# EAGLE board Assignment 1 (EAGLE 9.7.0)

Size 138.51 x 127.98 mm. Coordinates in mm from the lower left corner, seen from the top.
Outline: 0,0 138.51,0 138.51,127.98 0,127.98 0,0
Copper layers (1*16): Top 0.035mm / dielectric 1.5mm / Bottom 0.035mm
Design rules "default": minimum track width 6mil, minimum drill 0.35mm, track to track 6mil, track to pad 6mil, pad to pad 6mil, via to via 6mil, smd to smd 6mil, copper to edge 40mil, drill to drill 6mil, minimum pad ring 10mil, minimum via ring 8mil, stop-mask expansion 4mil, vias tented up to drill 0mil, thermal gap 10mil

## Footprints (pad centres in the part's own frame; a part is rotated, then mirrored left to right if it is on the bottom)
1X02 = drill 1.016 long: 1 -1.27,0; 2 1.27,0
PIEZO = drill 1 pad 1.6: 1 -3.5,0; 2 3.5,0
28027 = drill 1.016 long: 1 -2.54,0; 2 0,0; 3 2.54,0
RESAD1016W63L850D250B = drill 0.83 pad 1.43: 1 -5.08,0; 2 5.08,0
ARDUINO-UNO-R3-SHIELD = drill 1.016 pad 1.88: 3.3V 24.13,-2.54; 5V 24.13,0; A0 24.13,12.7; A1 24.13,15.24; A2 24.13,17.78; A3 24.13,20.32; A4 24.13,22.86; A5 24.13,25.4; AREF -24.13,-13.97; D2 -24.13,20.32; D3 -24.13,17.78; D4 -24.13,15.24; D5 -24.13,12.7; D6 -24.13,10.16; D7 -24.13,7.62; D8 -24.13,3.81; D9 -24.13,1.27; D10 -24.13,-1.27; D11 -24.13,-3.81; D12 -24.13,-6.35; D13 -24.13,-8.89; GND@0 24.13,2.54; GND@1 24.13,5.08; GND@2 -24.13,-11.43; IOREF 24.13,-7.62; NC 24.13,-10.16; RES 24.13,-5.08; RX -24.13,25.4; SCL -24.13,-19.05; SDA -24.13,-16.51; TX -24.13,22.86; VIN 24.13,7.62

## Placement (x,y rotation side)
L1  LIGHTBULB  [1X02]  34.33,104.92 0 top
PIEZO1  PIEZO  [PIEZO]  70.91,114.4 0 top
PIR1  PIR-SENSOR_28027  [28027]  117.56,50.36 0 top
R2  1k  [RESAD1016W63L850D250B]  41.79,99.33 90 top
U1  ARDUINO-UNO-R3-SHIELD  [ARDUINO-UNO-R3-SHIELD]  47.88,29.84 270 top

## Library data of the parts
L1 PIEZO1 PIR1 R2 U1 = Tinkercad

## Nets
L1_2: L1.2 R2.2
U1_5V: PIR1.2 U1.5V
U1_D3: PIEZO1.1 U1.D3
U1_D6: PIR1.1 U1.D6
U1_D10: R2.1 U1.D10
U1_GND: L1.1 PIEZO1.2 PIR1.3 U1.GND@0 U1.GND@1 U1.GND@2

## Tracks (layer width: path | path; a pad name or v marks a point on that pad's centre or on a via)
L1_2  (1 unrouted)
U1_5V  (1 unrouted)
U1_D3  (1 unrouted)
U1_D6  (1 unrouted)
U1_D10  (1 unrouted)
U1_GND  (5 unrouted)